# EAGLE board Timekeeper (EAGLE 8.5.2)
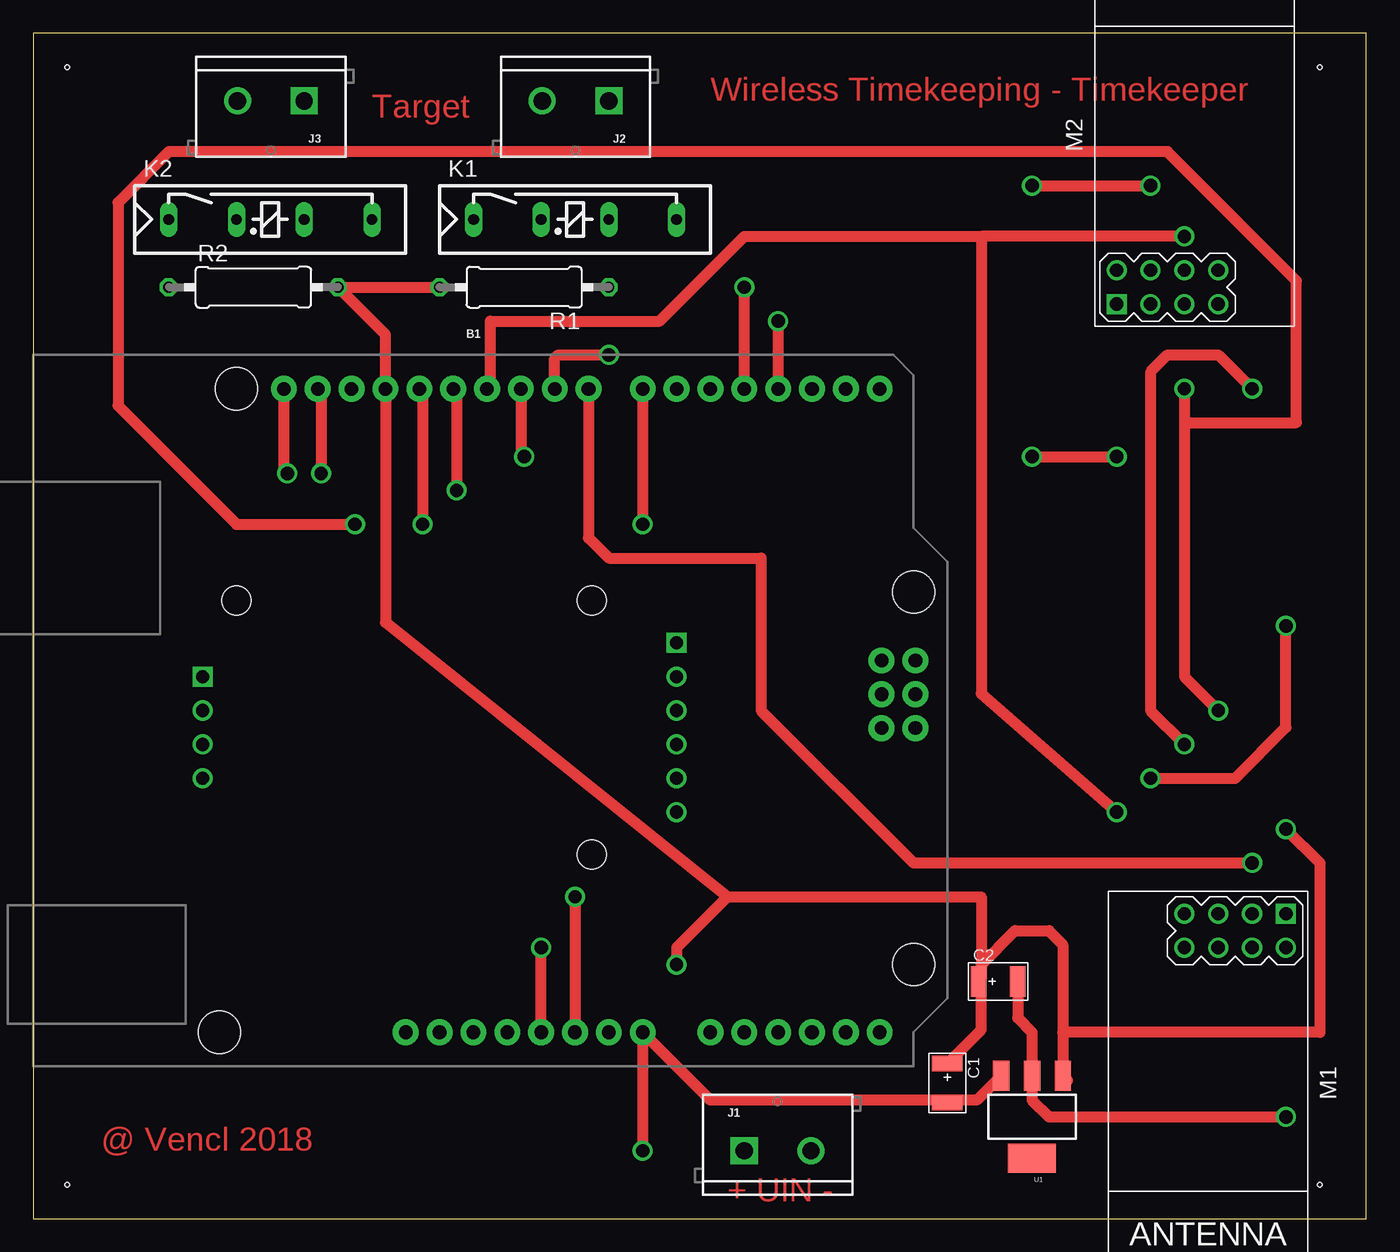
[diagram p0: board, top side]
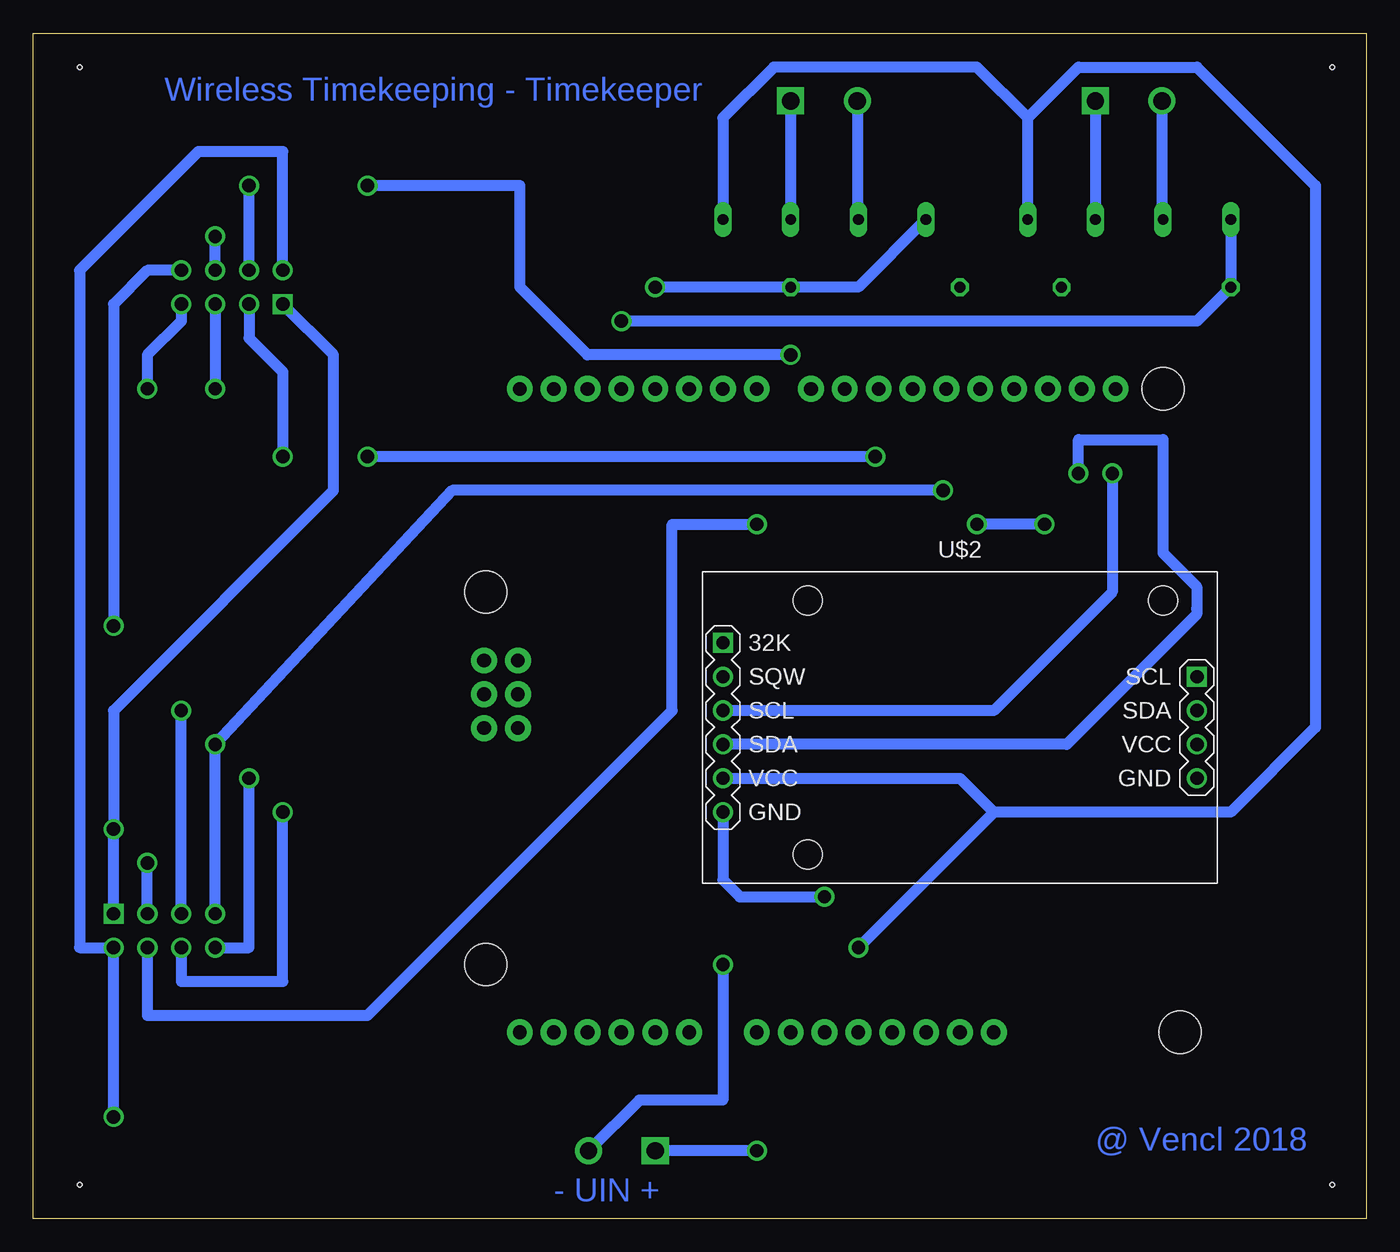
[diagram p1: board, bottom side, seen from below]

Size 100 x 88.89 mm. Coordinates in mm from the lower left corner, seen from the top.
Outline: 0,0 100,0 100,88.89 0,88.89 0,0
Copper layers (1*16): Top 0.035mm / dielectric 1.5mm / Bottom 0.035mm
Design rules "default *": minimum track width 20mil, minimum drill 0.35mm, track to track 6mil, track to pad 6mil, pad to pad 6mil, via to via 6mil, smd to smd 6mil, copper to edge 40mil, drill to drill 6mil, minimum pad ring 10mil, minimum via ring 8mil, stop-mask expansion 4mil, vias tented up to drill 0mil, thermal gap 10mil
Holes 0.35 mm at 2.54,2.54 96.52,2.54 2.54,86.36 96.52,86.36

## Footprints (pad centres in the part's own frame; a part is rotated, then mirrored left to right if it is on the bottom)
ARDUINO_R3 = drill 1.016 pad 1.93: 3.3V 2.54,-24.13; 5V 5.08,-24.13; A0 17.78,-24.13; A1 20.32,-24.13; A2 22.86,-24.13; A3 25.4,-24.13; A4 27.94,-24.13; A5 30.48,-24.13; AREF -9.144,24.13; D0 30.48,24.13; D1 27.94,24.13; D2 25.4,24.13; D3 22.86,24.13; D4 20.32,24.13; D5 17.78,24.13; D6 15.24,24.13; D7 12.7,24.13; D8 8.636,24.13; D9 6.096,24.13; D10 3.556,24.13; D11 1.016,24.13; D12 -1.524,24.13; D13 -4.064,24.13; GND@1 7.62,-24.13; GND@2 10.16,-24.13; GND@3 -6.604,24.13; GND@4 33.16,-1.32; IOREF -2.54,-24.13; MISO 30.62,3.76; MOSI 33.16,1.22; NC -5.08,-24.13; RESET@1 0,-24.13; RESET@2 30.62,-1.32; SCK 30.62,1.22; SCL -14.224,24.13; SDA -11.684,24.13; VCC 33.16,3.76; VIN 12.7,-24.13 | hole 3.175: -17.78,24.13; 33.02,8.89; 33.02,-19.05; -19.05,-24.13
AVX-B = smd 1.143 x 2.286: + -1.46,0; - 1.46,0
SCREWTERMINAL-5MM-2 = drill 1.3 pad 2.032 square: 1 0,0 | drill 1.3 pad 2.032: 2 5,0
REED = drill 0.813 long: 1 -17.78,2.54; 3 -12.7,2.54; 5 -7.62,2.54; 7 -2.54,2.54
WIRELESS-NRF24L01 = drill 1 square: 1 -12.7,6.35 | drill 1: 2 -10.16,6.35; 3 -12.7,3.81; 4 -10.16,3.81; 5 -12.7,1.27; 6 -10.16,1.27; 7 -12.7,-1.27; 8 -10.16,-1.27
0309/12 = drill 0.813 octagon: 1 -6.35,0; 2 6.35,0
SOT223 = smd 1.219 x 2.235: 1 -2.311,-3.099; 2 0,-3.099; 3 2.311,-3.099 | smd 3.6 x 2.2: 4 0,3.099
RTC-DS3231-AT24C32 = drill 1 square: J1.1 -17.78,6.35; J2.1 17.78,3.81 | drill 1: J1.2 -17.78,3.81; J1.3 -17.78,1.27; J1.4 -17.78,-1.27; J1.5 -17.78,-3.81; J1.6 -17.78,-6.35; J2.2 17.78,1.27; J2.3 17.78,-1.27; J2.4 17.78,-3.81 | hole 2.2: -11.43,-9.525; -11.43,9.525; 15.24,9.525

## Placement (x,y rotation side)
B1  ARDUINO_UNO_R3  [ARDUINO_R3]  33.02,38.1 0 top
C1  10uf  [AVX-B]  68.58,10.16 270 top
C2  10uf  [AVX-B]  72.39,17.78 0 top
J1  [SCREWTERMINAL-5MM-2]  53.34,5.08 0 top
J2  [SCREWTERMINAL-5MM-2]  43.18,83.82 180 top
J3  [SCREWTERMINAL-5MM-2]  20.32,83.82 180 top
K1  35701331  [REED]  50.8,72.39 0 top
K2  35701331  [REED]  27.94,72.39 0 top
M1  WIRELESS-NRF24L01  [WIRELESS-NRF24L01]  87.63,10.16 270 top
M2  WIRELESS-NRF24L01  [WIRELESS-NRF24L01]  87.63,81.28 90 top
R1  [0309/12]  36.83,69.85 180 top
R2  [0309/12]  16.51,69.85 0 top
U1  [SOT223]  74.93,7.62 180 top
U$2  RTC-DS3231-AT24C32  [RTC-DS3231-AT24C32]  30.48,36.83 0 bottom

## Library data of the parts
B1 = SparkFun-Boards
C1 C2 = Seeed-Capacitor; MPN: TAJB106K016RNJ
J1-J3 = SparkFun-Connectors; SF_SKU: PRT-08432
K1 K2 = relay; OC_FARNELL: unknown; OC_NEWARK: unknown
M1 M2 U$2 = diy-modules
R1 R2 = resistor
U1 = SparkFun-IC-Power; PROD_ID: VREG-08170

## Nets
GND.2: U$2.J2.4
N$1: B1.D8 M1.3
N$2: B1.5V K1.7 K2.7 U$2.J1.5
N$3: B1.D13 M1.5 M2.5
N$4: B1.D11 M1.6 M2.6
N$5: B1.D12 M1.7 M2.7
N$6: M1.8 M2.8
N$7: B1.D7 M1.4
N$8: B1.VIN C1.- J1.1 U1.3
N$9: B1.GND@1 U$2.J1.6
N$10: B1.D4 K1.1 R1.1
N$11: B1.SDA U$2.J1.4
N$12: B1.SCL U$2.J1.3
N$13: B1.D3 K2.1 R2.1
N$14: B1.D10 M2.3
N$15: J2.2 K1.3
N$16: J2.1 K1.5
N$17: J3.2 K2.3
N$18: J3.1 K2.5
N$19: B1.D9 M2.4
N$23: B1.GND@3 C1.+ C2.+ J1.2 M1.1 M2.1 R1.2 R2.2 U1.1
N$24: C2.- M1.2 M2.2 U1.2
VCC.2: U$2.J2.3

## Tracks (layer width: path | path; a pad name or v marks a point on that pad's centre or on a via)
N$1  (via drill 1)
  Top 0.813: B1.D8 41.66,51.05 43.18,49.53 54.61,49.53 54.61,38.1 66.04,26.67 v91.44,26.67
  Bottom 0.813: M1.3 v91.44,26.67
N$2  (via drill 1)
  Top 0.813: B1.5V v38.1,20.32
  Bottom 0.813: 25.4,82.55 29.21,86.36 44.45,86.36 48.26,82.55 K1.7 | K2.7 25.4,82.55 | 25.4,82.55 21.59,86.36 12.7,86.36 3.81,77.47 3.81,36.83 10.16,30.48 27.94,30.48 | 27.94,30.48 v38.1,20.32 | 27.94,30.48 30.48,33.02 U$2.J1.5
N$3  (via drill 1)
  Top 0.813: 86.36,59.69 86.36,40.64 v88.9,38.1 | v86.36,62.23 86.36,59.69 | 86.36,59.69 94.77,59.69 94.77,70.33 85.09,80.01 10.16,80.01 6.35,76.2 6.35,60.96 15.24,52.07 v24.13,52.07 | B1.D13 29.21,61.98 v29.21,52.07
  Bottom 0.813: M2.5 v86.36,62.23 | M1.5 v88.9,38.1 | v24.13,52.07 v29.21,52.07
N$4  (via drill 1)
  Top 0.813: v86.36,73.66 71.12,73.66 | 71.12,73.66 53.34,73.66 46.99,67.31 34.29,67.31 34.29,62.48 B1.D11 | 71.12,73.66 71.12,39.37 v81.28,30.48
  Bottom 0.813: M1.6 88.9,17.78 81.28,17.78 v81.28,30.48 | M2.6 v86.36,73.66
N$5  (via drill 1)
  Top 0.813: v86.36,35.56 83.86,38.06 83.86,63.54 85.09,64.77 88.9,64.77 v91.44,62.23 | B1.D12 31.75,61.98 v31.75,54.61
  Bottom 0.813: M1.7 v86.36,35.56 68.58,54.61 v31.75,54.61 | M2.7 88.9,67.31 91.44,64.77 v91.44,62.23
N$6  (via drill 1)
  Top 0.813: v83.82,33.02 90.17,33.02 93.98,36.83 v93.98,44.45
  Bottom 0.813: M2.8 91.44,71.12 93.98,68.58 v93.98,44.45 | M1.8 83.82,20.32 v83.82,33.02
N$7  (via drill 1)
  Top 0.813: B1.D7 v45.72,52.07
  Bottom 0.813: M1.4 91.44,15.24 74.93,15.24 52.07,38.1 52.07,52.07 v45.72,52.07
N$8  (via drill 1)
  Top 0.813: U1.3 70.79,8.89 68.39,8.89 | v45.72,5.08 B1.VIN 50.8,8.89 67.31,8.89 68.39,8.89 | C1.- 68.39,8.89
  Bottom 0.813: v45.72,5.08 J1.1
N$9  (via drill 1)
  Top 0.813: v40.64,24.13 B1.GND@1
  Bottom 0.813: U$2.J1.6 48.26,25.4 46.99,24.13 v40.64,24.13
N$10  (via drill 1)
  Top 0.813: B1.D4 v53.34,69.85
  Bottom 0.813: K1.1 38.1,69.85 R1.1 v53.34,69.85
N$11  (via drill 1)
  Top 0.813: B1.SDA 21.59,61.98 v21.59,55.88
  Bottom 0.813: v21.59,55.88 21.59,58.42 15.24,58.42 15.24,49.92 12.72,47.4 12.72,45.74 12.7,45.72 12.72,45.7 12.72,45.31 22.47,35.56 U$2.J1.4
N$12  (via drill 1)
  Top 0.813: B1.SCL 18.8,56.13 v19.05,55.88
  Bottom 0.813: v19.05,55.88 19.05,46.99 27.94,38.1 U$2.J1.3
N$13  (via drill 1)
  Top 0.813: v55.88,67.31 B1.D3
  Bottom 0.813: K2.1 R2.1 12.7,67.31 v55.88,67.31
N$14  (via drill 1)
  Top 0.813: B1.D10 36.58,57.4 v36.83,57.15 | v74.93,57.15 v81.28,57.15
  Bottom 0.813: v36.83,57.15 v74.93,57.15 | v81.28,57.15 81.28,63.5 83.82,66.04 M2.3
N$15
  Bottom 0.813: J2.2 38.18,75.01 K1.3
N$16
  Bottom 0.813: J2.1 K1.5
N$17
  Bottom 0.813: J3.2 15.32,75.01 K2.3
N$18
  Bottom 0.813: J3.1 K2.5
N$19  (via drill 1)
  Top 0.813: B1.D9 39.12,64.52 39.37,64.77 v43.18,64.77 | v74.93,77.47 v83.82,77.47
  Bottom 0.813: v43.18,64.77 58.42,64.77 63.5,69.85 63.5,77.47 v74.93,77.47 | M2.4 v83.82,77.47
N$23  (via drill 1)
  Top 0.813: 52.07,24.13 71.12,24.13 71.12,19.05 | 71.12,19.05 71.12,17.97 | 71.12,17.97 C2.+ | 52.07,24.13 26.42,44.7 B1.GND@3 26.42,66.29 R2.2 R1.2 | 52.07,24.13 48.26,20.32 v48.26,19.05 | 77.61,10.35 U1.1 77.24,13.97 | 71.12,19.05 73.66,21.59 76.2,21.59 77.24,20.55 77.24,13.97 | C1.+ 71.12,14.16 71.12,17.97 | v93.98,29.21 96.52,26.67 96.52,13.97 77.24,13.97
  Bottom 0.813: v48.26,19.05 48.26,8.89 54.53,8.89 J1.2 | M1.1 v93.98,29.21 93.98,38.1 77.47,54.61 77.47,64.77 M2.1
N$24  (via drill 1)
  Top 0.813: C2.- 73.85,15.05 74.93,13.97 U1.2 74.93,8.89 76.2,7.62 v93.98,7.62
  Bottom 0.813: M2.2 81.28,80.01 87.63,80.01 96.52,71.12 96.52,20.32 M1.2 v93.98,7.62

## Text on the board
Top: Wireless Timekeeping - Timekeeper | Target | @ Vencl 2018 | + UIN -
Bottom: Wireless Timekeeping - Timekeeper | @ Vencl 2018 | - UIN +